# Altium PCB MainPCB.PcbDoc (part 3 of 4)
Units mm, origin at the board's own origin, x right, y up, seen from the top; angles counter-clockwise.
Board outline 219.96 x 164.97 mm, 2 copper layers (Top Layer, Bottom Layer); 298 components, 220 nets, 976 pads, 1045 vias.
Unrouted connection lines stored in the file: 1.
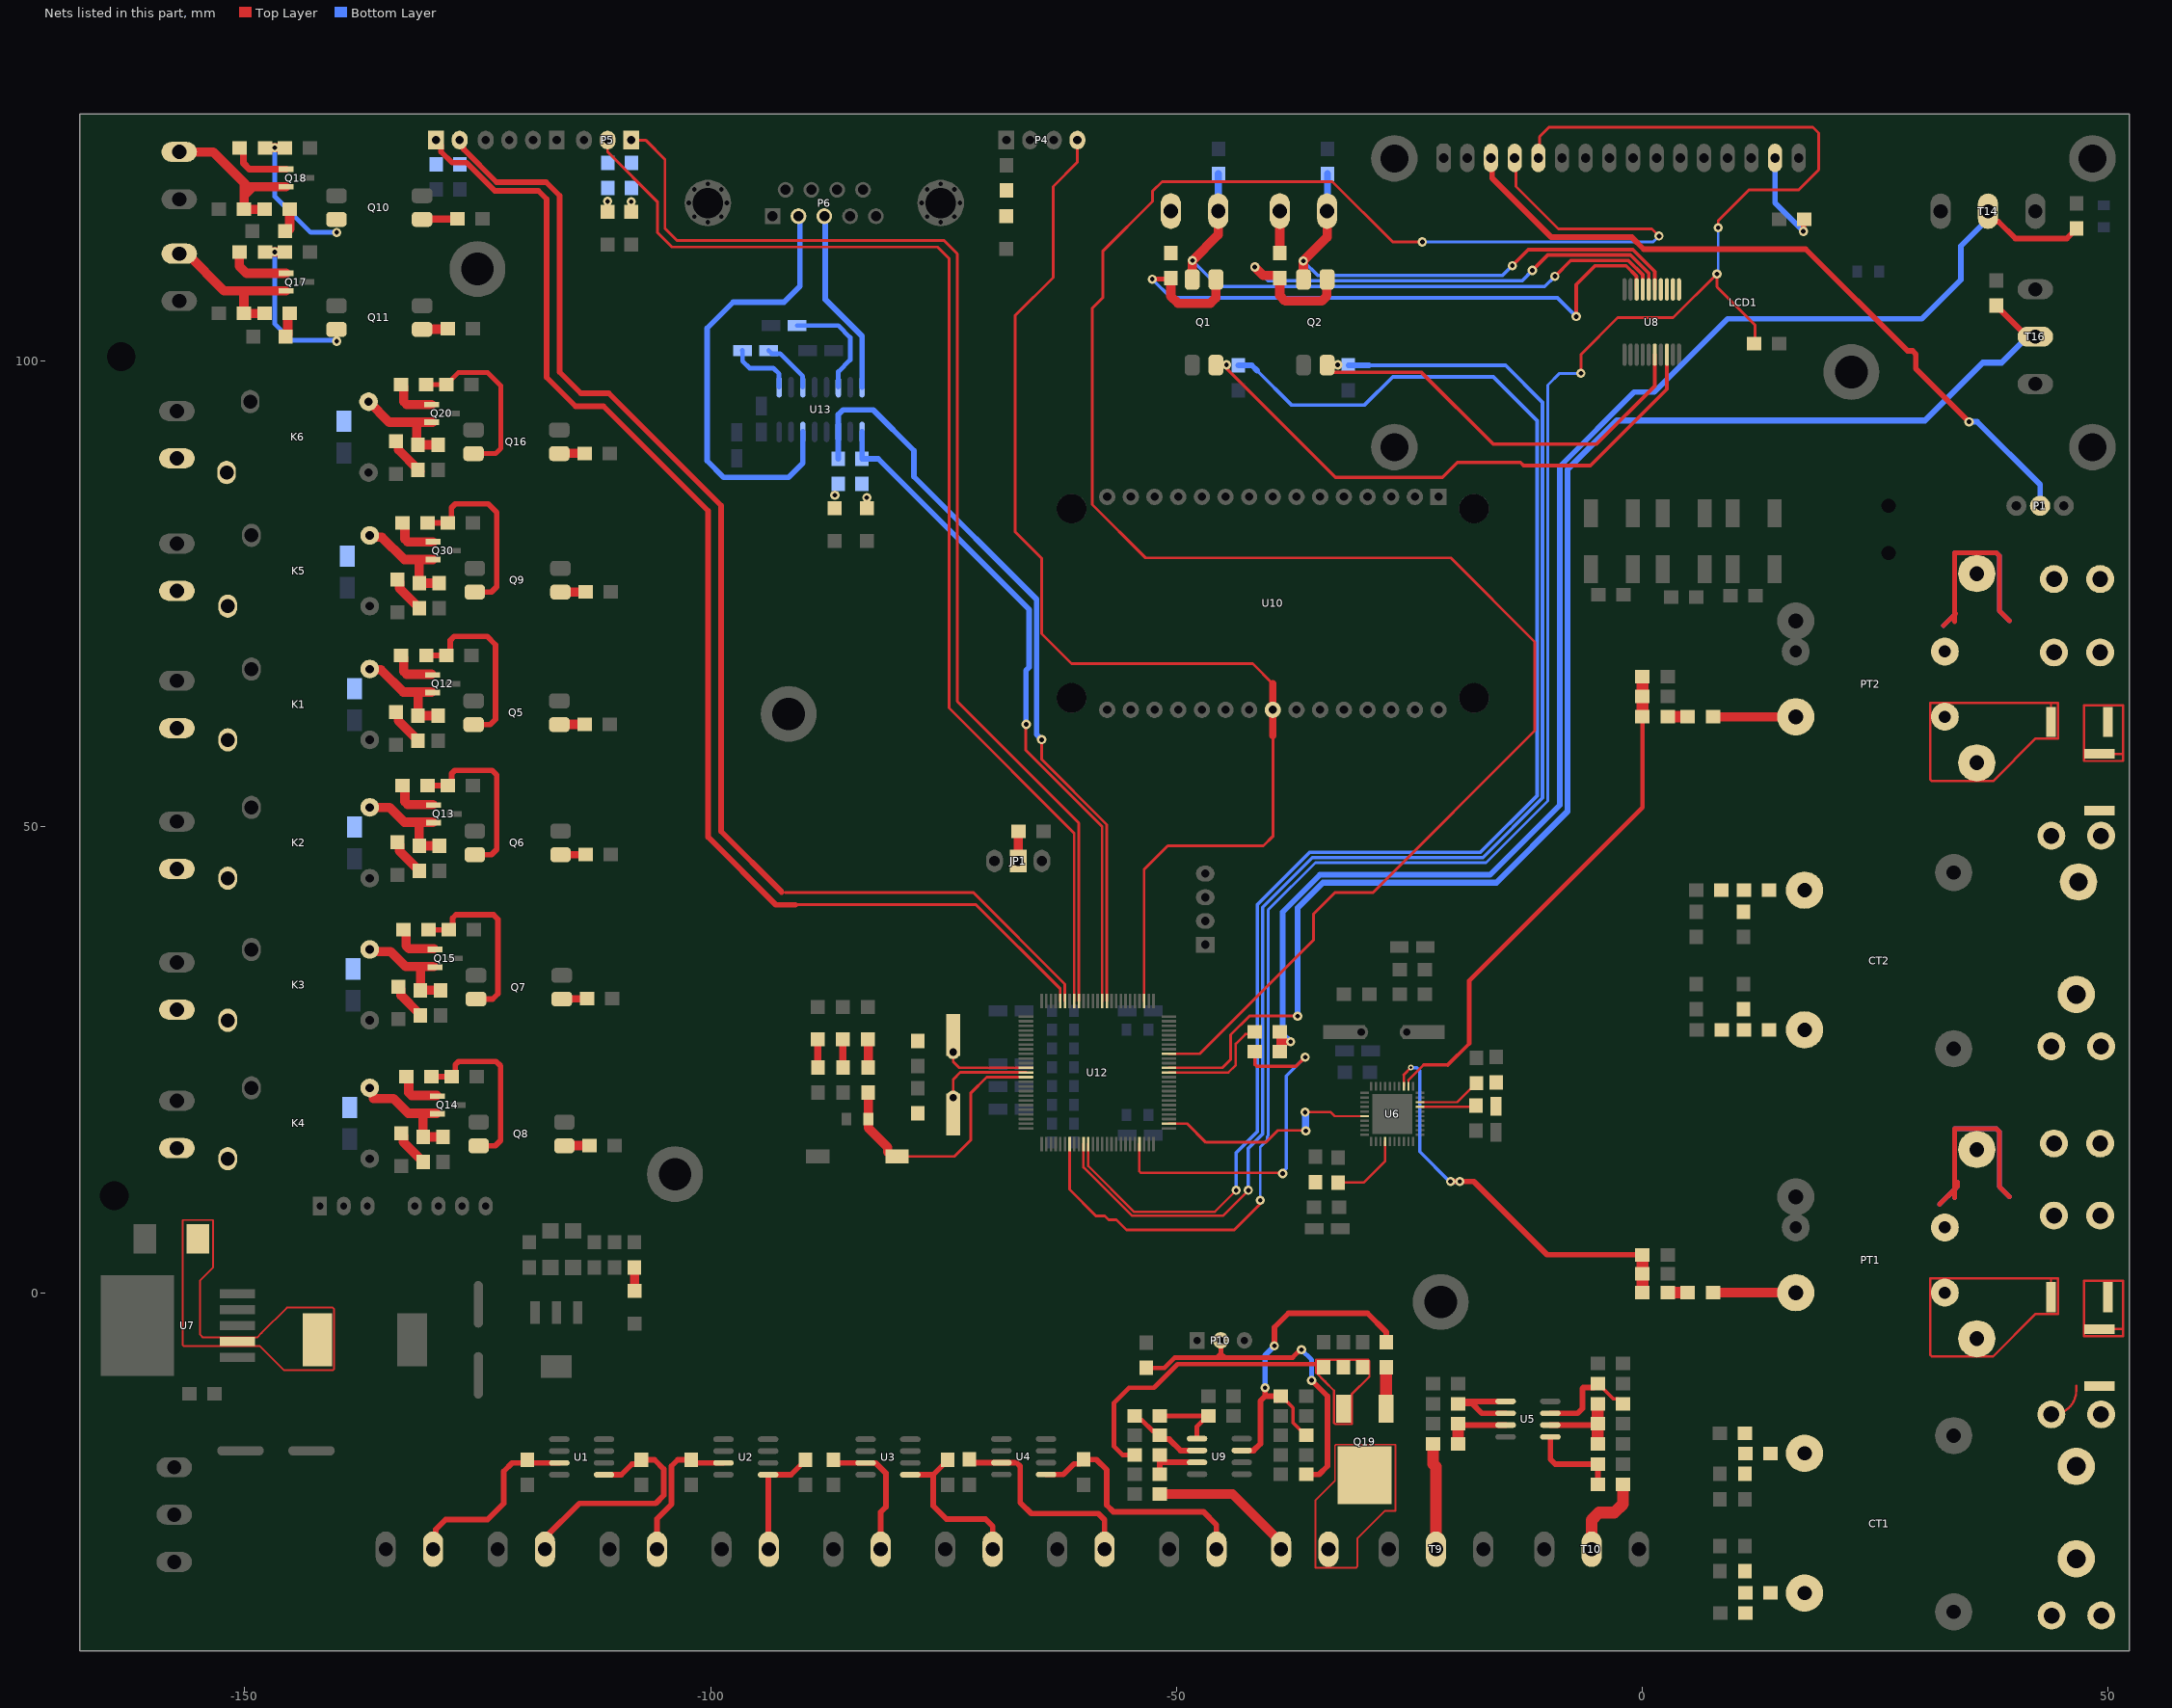
[diagram p3: the nets of this part, all layers, seen from the top]

## Via types
v1: diameter 0.762, hole 0.381, Top Layer to Bottom Layer, tented both sides, 733 vias
v2: diameter 1, hole 0.5, Top Layer to Bottom Layer, tented both sides, 230 vias
v3: diameter 1, hole 0.5, Top Layer to Bottom Layer, 35 vias
v4: diameter 1.2, hole 0.6, Top Layer to Bottom Layer, tented both sides, 28 vias
v5: diameter 0.8, hole 0.4, Top Layer to Bottom Layer, tented both sides, 10 vias
v6: diameter 1.27, hole 0.711, Top Layer to Bottom Layer, tented both sides, 4 vias
v7: diameter 0.6, hole 0.3, Top Layer to Bottom Layer, tented both sides, 3 vias
v8: diameter 1.27, hole 0.711, Top Layer to Bottom Layer, 1 vias
v9: diameter 0.9, hole 0.45, Top Layer to Bottom Layer, tented both sides, 1 vias

## Nets (pads, with @x,y where several pads share a name; then routed paths per layer and width w, separated by ;. In a path a pad name is that pad's centre, name@x,y a point inside that pad or via, vN(x,y) a via of type N, cw(c..) or ccw(c..) an arc to the next point about the centre after c; other vN are vias at no path point) (continued)
NetC33_1: C33.1 R108.1 R112.2 U9.7 | length 37.7
  Top Layer w0.381: R112.2@-38.803,-11.116 -38.703,-11.216 -38.653,-11.216 -37.503,-12.366 -37.503,-13.966 -36.153,-15.316 C33.1@-36.103,-15.316
  Top Layer w0.61: U9.7@-43.003,-16.946 -41.733,-16.946 -41.003,-16.216 -41.003,-16.18 -40.998,-16.175 -40.998,-15.177 -41.003,-15.172 -41.003,-11.616 -40.503,-11.116 ; v2(-40.503,-10.216) -40.503,-11.116 ; v2(-39.503,-5.716) -39.503,-3.716 -38.003,-2.216 -29.503,-2.216 -27.503,-4.216 R108.1@-27.503,-5.084 ; R112.2@-39.223,-11.536 R112.2@-38.803,-11.116 -40.503,-11.116 ; R108.1@-27.735,-5.084 R108.1@-27.503,-5.316
  Bottom Layer w0.61: v2(-40.503,-10.216) -40.503,-6.716 v2(-39.503,-5.716)
NetC47_1: C47.1 pad.9@-73.977,25.828 U12.12 Y3.2 | length 11.3
  Top Layer w0.3: Y3.2@-73.977,26.322 -73.977,24.78 -73.334,24.137 U12.12@-66.163,24.137
  Top Layer w1: Y3.2@-73.977,27.633 -73.977,26.322 Y3.2@-73.727,26.072
NetC48_1: C48.1 pad.8@-73.977,20.938 U12.13 Y3.1 | length 11.9
  Top Layer w0.3: Y3.1@-73.977,20.081 -73.977,20.633 -73.977,22.875 -73.215,23.637 U12.13@-66.163,23.637
  Top Layer w1: Y3.1@-73.977,19.133 Y3.1@-73.977,20.081
NetC49_1: C49.1 U13.1 | length 7.1
  Bottom Layer w0.5: C49.1@-96.589,101.135 -96.583,101.129 -96.583,99.992 -95.821,99.23 -93.281,99.23 -92.665,98.614 -92.665,97.204 U13.1@-92.646,97.185
NetC49_2: C49.2 U13.3 | length 6
  Bottom Layer w0.5: C49.2@-93.789,101.135 -93.44,100.785 -92.551,100.785 -90.125,98.36 -90.125,97.204 U13.3@-90.106,97.185
NetC51_2: C51.2 U13.6 | length 12.1
  Bottom Layer w0.5: C51.2@-90.741,103.802 -86.296,103.802 -85.026,102.532 -85.026,100.119 -86.296,98.849 U13.6@-86.296,97.185
NetCT1_1: CT1.1 Fr3.1
NetCT1_2: CT1.2 Fr1.1
NetCT1_3: pad.7@46.546,32.019 X8.1
NetCT2_1: CT2.1 Fr6.1
NetCT2_2: CT2.2 Fr4.1
NetCT2_3: pad.7@46.546,-28.56 X10.1
NetD1_1: D1.1 R30.1 | length 2.6
  Top Layer w1: D1.1@-108.172,0.173 R30.1@-108.172,2.713 R30.1@-108.108,2.777
NetD2_2: D2.2 L1.2 U7.2 | length 69.9
  Top Layer w0.2: U7.2@-152.191,-5.21 U7.2@-152.586,-4.815 ; -148.199,-4.328 -148.686,-4.815 U7.2@-152.586,-4.815 ; -148.199,-4.327 -145.477,-1.605 -140.547,-1.605 -140.43,-1.722 -140.43,-8.219 -140.547,-8.336 -145.797,-8.336 -148.418,-5.715 -156.569,-5.715 -156.686,-5.598 -156.686,7.793 -153.384,7.793 -153.384,2.713 -154.786,1.311 -154.786,-4.521 -154.492,-4.815 U7.2@-152.586,-4.815
NetD4_1: D4.1 R66.1 | length 4.1
  Top Layer w1: D4.1@-133.754,62.308 -133.504,62.058 -133.504,61.377 -131.628,59.501 -131.628,59.451 R66.1@-131.403,59.226
NetD5_1: D5.1 R68.1 | length 4.1
  Top Layer w1: D5.1@-133.627,48.338 -133.377,48.088 -133.377,47.407 -131.501,45.531 -131.501,45.481 R68.1@-131.276,45.256
NetD6_1: D6.1 R69.1 | length 4.1
  Top Layer w1: D6.1@-133.218,17.096 -132.968,16.846 -132.968,16.165 -131.092,14.289 -131.092,14.239 R69.1@-130.867,14.014
NetD7_1: D7.1 R70.1 | length 4.1
  Top Layer w1: D7.1@-133.5,32.844 -133.25,32.594 -133.25,31.913 -131.374,30.037 -131.374,29.987 R70.1@-131.149,29.762
NetD8_1: D8.1 R74.1 | length 4.1
  Top Layer w1: D8.1@-133.634,76.532 -133.384,76.282 -133.384,75.601 -131.508,73.725 -131.508,73.675 R74.1@-131.283,73.45
NetD9_1: D9.1 R75.1 | length 2.7
  Top Layer w1.016: D9.1@-145.605,102.631 -145.389,102.847 -145.389,104.89 R75.1@-145.173,105.106
NetD10_1: D10.1 R76.1 | length 2.1
  Top Layer w1: D10.1@-145.173,114.14 R76.1@-145.173,116.282
NetD15_2: D15.2 R80.2 | length 3
  Top Layer w1: D15.2@-83.103,27.184 -83.09,27.172 -83.09,24.196 R80.2@-83.078,24.184
NetD16_2: D16.2 R88.2
NetD17_2: D17.2 R89.2 | length 0.2
  Top Layer w0.6: D17.2@-111.442,116.02 D17.2@-111.315,116.147
  other v2: -111.061,117.137
NetD18_2: D18.2 R90.2
  other v2: -108.521,117.109
NetD19_2: D19.2 R91.2
  other v2: -83.248,85.338
NetD20_2: D20.2 R92.2
  other v2: -86.677,85.592
NetD21_1: D21.1 R77.1 | length 4.3
  Top Layer w1: D21.1@-133.761,91.391 -133.511,91.141 -133.511,90.46 -131.41,88.359 R77.1@-131.41,88.309 R77.1@-131.219,88.118
NetD24_2: D24.2 R96.2 | length 3
  Top Layer w0.762: R96.2@-85.803,24.184 D24.2@-85.803,27.184
NetD25_2: D25.2 R97.2 | length 3
  Top Layer w0.762: R97.2@-88.503,24.184 D25.2@-88.503,27.184
NetFr1_2: Fr1.2 R28.1 R34.1
NetFr2_1: Fr2.1 pad.10@16.449,0 PT1.2 | length 8.9
  Top Layer w1: Fr2.1@7.525,0 Fr2.1@7.559,0 pad.10@16.449,0
NetFr2_2: Fr2.2 R118.2 | length 2
  Top Layer w1.27: R118.2@2.827,0 Fr2.2@4.859,0
NetFr3_2: Fr3.2 R36.2 R37.1
NetFr4_2: Fr4.2 R38.1 R40.1
NetFr5_1: Fr5.1 pad.10@16.449,61.817 PT2.2 | length 8.9
  Top Layer w1: Fr5.1@7.559,61.817 PT2.2@16.449,61.817
NetFr5_2: Fr5.2 R119.2 | length 2.2
  Top Layer w1.27: R119.2@2.7,61.817 Fr5.2@4.859,61.817
NetFr6_2: Fr6.2 R42.2 R43.1
NetJP1_2: JP1.2 R84.1 | length 3.2
  Top Layer w1: JP1.2@-67.003,46.334 -66.978,46.359 -66.978,49.509 R84.1@-66.953,49.534
NetLCD1_3: LCD1.3 P1.2 | length 77.8
  Top Layer w0.6: LCD1.3@-16.129,121.793 -16.129,119.634 -9.779,113.284 -1.143,113.284 0.127,112.014 17.526,112.014 28.448,101.092 28.986,101.092 29.337,100.741 29.337,99.187 v3(35.052,93.472)
  Bottom Layer w0.6: v3(35.052,93.472) 35.941,93.472 42.672,86.741 P1.2@42.672,84.455
NetLCD1_15: LCD1.15 R23.1 | length 10.6
  Top Layer w0.6: v3(17.272,113.919) 17.272,115.109 R23.1@17.352,115.189
  Bottom Layer w0.6: LCD1.15@14.097,121.92 LCD1.15@14.224,121.793 14.224,116.967 v3(17.272,113.919)
NetP10_2: P10.2 R107.1 R116.1 | length 37.2
  Top Layer w0.508: R116.1@-53.258,-8.084 -51.305,-8.084 -50.183,-6.962 -45.692,-6.962 ; P10.2@-45.257,-5.13 -45.257,-6.527 ; -44.495,-6.962 -44.822,-6.962 ; v2(-36.603,-6.116) -36.696,-6.116 -37.542,-6.962 -44.822,-6.962 ; -45.692,-6.962 -45.257,-6.962 ; -45.692,-6.962 -45.257,-6.527 ; -45.257,-6.962 -44.822,-6.962 ; -45.257,-6.962 -45.257,-6.527 ; -45.257,-6.527 -44.822,-6.962
  Top Layer w0.61: R107.1@-36.103,-19.516 -34.703,-19.516 -33.803,-18.616 -33.803,-11.116 v2(-35.503,-9.416)
  Bottom Layer w0.508: v2(-36.603,-6.116) -35.503,-7.216 v2(-35.503,-9.416)
NetPT1_4: pad.10@35.88,-4.953 PT1.4 R33.2 | length 43.5
  Top Layer w0.254: R33.2@43.843,-0.495 43.843,1.537 ; 43.843,1.537 44.609,1.537 44.609,-2.273 44.228,-2.273 42.196,-2.273 37.624,-6.845 31.042,-6.845 30.893,-6.696 30.893,1.537 43.843,1.537
NetPT2_4: pad.10@35.88,56.864 PT2.4 R85.2 | length 43.5
  Top Layer w0.254: R85.2@43.843,61.26 43.843,63.292 ; 43.843,63.292 30.893,63.292 30.893,55.059 31.042,54.91 37.624,54.91 42.196,59.482 44.228,59.482 44.609,59.482 44.609,63.292 43.843,63.292
NetQ5_1: Q5.1 R47.2 | length 2.7
  Top Layer w1: Q5.1@-116.225,60.991 R47.2@-113.549,60.991
NetQ6_1: Q6.1 R50.2 | length 2.7
  Top Layer w0.762: Q6.1@-116.113,47.005 -116.098,47.021 -113.422,47.021 R50.2@-113.407,47.036
NetQ7_1: Q7.1 R51.2 | length 2.7
  Top Layer w0.8: Q7.1@-115.986,31.511 -115.97,31.527 -113.295,31.527 R51.2@-113.28,31.542
NetQ8_1: Q8.1 R52.2 | length 2.7
  Top Layer w1: Q8.1@-115.704,15.763 -115.689,15.779 -113.013,15.779 R52.2@-112.998,15.794
NetQ9_1: Q9.1 R17.2 | length 2.7
  Top Layer w1: Q9.1@-116.12,75.199 -116.105,75.215 -113.429,75.215 R17.2@-113.414,75.23
NetQ10_1: Q10.1 R57.2 | length 3.8
  Top Layer w0.762: Q10.1@-130.972,115.204 -130.941,115.235 -127.203,115.235 R57.2@-127.172,115.266
NetQ11_1: Q11.1 R58.2 | length 2.8
  Top Layer w1: Q11.1@-130.972,103.393 -130.941,103.424 -128.266,103.424 R58.2@-128.235,103.455
NetQ12_1: Q12.1 R59.2 | length 5
  Top Layer w1: R59.2@-133.214,68.403 -133.164,68.403 -132.939,68.178 -132.939,66.681 -132.628,66.37 Q12.1@-129.934,66.37
NetQ13_1: Q13.1 R60.2 | length 5
  Top Layer w1: R60.2@-133.087,54.433 -133.037,54.433 -132.812,54.208 -132.812,52.711 -132.501,52.4 Q13.1@-129.807,52.4
NetQ14_1: Q14.1 R61.2 | length 5
  Top Layer w1: R61.2@-132.678,23.191 -132.628,23.191 -132.403,22.966 -132.403,21.469 -132.092,21.158 Q14.1@-129.398,21.158
NetQ15_1: Q15.1 R62.2 | length 5
  Top Layer w1: R62.2@-132.96,38.939 -132.91,38.939 -132.685,38.714 -132.685,37.217 -132.374,36.906 Q15.1@-129.68,36.906
NetQ16_1: Q16.1 R53.2 | length 2.7
  Top Layer w1: Q16.1@-116.216,90.089 R53.2@-113.541,90.089
NetQ17_1: Q17.1 R64.2 | length 6.9
  Top Layer w1: R64.2@-150.54,111.71 -150.587,111.663 -150.587,110.186 -149.824,109.423 Q17.1@-145.562,109.423
NetQ18_1: Q18.1 R65.2 | length 6.7
  Top Layer w0.762: R65.2@-150.54,122.886 -150.49,122.886 -150.146,122.542 -150.146,121.222 -149.523,120.599 Q18.1@-145.562,120.599
NetQ19_1: Q19.1 R108.2 | length 4.4
  Top Layer w1.27: Q19.1@-27.518,-12.436 -27.51,-12.428 -27.51,-8.023 R108.2@-27.503,-8.016
NetQ19_2: Q19.2 T20.2 | length 42.4
  Top Layer w0.2: T20.2@-33.707,-27.545 -33.707,-29.516 ; -33.707,-29.516 -30.72,-29.516 -30.603,-29.399 -30.603,-26.416 -27.603,-23.416 -26.503,-23.416 -26.503,-16.316 -32.886,-16.316 -33.003,-16.433 -33.003,-20.216 -35.103,-22.316 -35.103,-29.516 -33.707,-29.516
NetQ19_3: Q19.3 R109.1 R113.2 R114.2 R115.2 | length 54.5
  Top Layer w0.254: R115.2@-34.203,-8.016 -34.203,-7.216 ; -34.203,-7.216 -29.452,-7.216 -29.303,-7.365 -29.303,-9.016 -31.203,-10.916 -31.203,-14.116 -32.954,-14.116 -33.103,-13.967 -33.103,-10.516 -34.05,-9.569 -34.05,-9.558 -35.003,-8.605 -35.003,-7.67 -35.003,-7.216 -34.203,-7.216
  Top Layer w0.508: R109.1@-54.503,-17.416 -55.803,-17.416 -56.703,-16.516 -56.703,-11.82 -55.096,-10.213 -52.433,-10.213 -49.889,-7.67 -35.003,-7.67 R115.2@-34.803,-7.67
NetQ20_1: Q20.1 R63.2 | length 5.1
  Top Layer w1: R63.2@-133.221,97.486 -133.171,97.486 -132.946,97.261 -132.946,95.637 -132.635,95.326 Q20.1@-129.941,95.326
NetQ30_1: Q30.1 R56.2 | length 5
  Top Layer w1: R56.2@-133.094,82.627 -133.044,82.627 -132.819,82.402 -132.819,80.905 -132.508,80.594 Q30.1@-129.814,80.594
NetR1_2: R1.2 T1.2 U1.3 | length 20.5
  Top Layer w0.6: T1.2@-129.792,-27.545 -129.5,-27.253 -129.5,-25.413 -128.453,-24.366 -123.953,-24.366 -122.203,-22.616 -122.203,-19.173 -121.303,-18.273 U1.3@-116.242,-18.273
NetR2_2: R2.2 T2.2 U1.5 | length 27.2
  Top Layer w0.6: T2.2@-117.781,-27.545 -117.781,-26.298 -114.1,-22.616 -105.903,-22.616 -105.028,-21.741 -105.028,-18.941 -106.03,-17.939 R2.2@-107.443,-17.939 -107.443,-17.989 -107.868,-18.414 -108.451,-18.414 -109.58,-19.543 U1.5@-111.442,-19.543
  Bottom Layer w0.6: T2.2@-117.781,-27.545 T2.2@-117.781,-26.532
NetR3_2: R3.2 T3.2 U2.3 | length 15.6
  Top Layer w0.6: T3.2@-105.771,-27.545 -105.771,-24.284 -104.203,-22.716 -104.203,-18.616 -103.526,-17.939 R3.2@-102.075,-17.939 -101.741,-18.273 U2.3@-98.633,-18.273
NetR4_2: R4.2 T4.2 U2.5 | length 12.7
  Top Layer w0.6: U2.5@-93.833,-19.543 U2.5@-93.797,-19.543 ; T4.2@-93.797,-27.509 U2.5@-93.797,-19.543 ; R4.2@-89.834,-17.939 -89.834,-17.989 -91.388,-19.543 U2.5@-93.797,-19.543
  Bottom Layer w0.6: T4.2@-93.806,-27.5 T4.2@-93.76,-27.545
NetR5_2: R5.2 T5.2 U3.3 | length 14.6
  Top Layer w0.6: R5.2@-86.831,-17.939 -86.497,-18.273 U3.3@-83.376,-18.273 -82.303,-18.273 -81.203,-19.373 -81.203,-23.016 -81.75,-23.563 T5.2@-81.75,-27.545
NetR6_2: R6.2 T6.2 U3.5 | length 17.9
  Top Layer w0.6: U3.5@-78.576,-19.543 U3.5@-77.776,-19.543 ; U3.5@-77.739,-19.58 U3.5@-77.776,-19.543 ; R6.2@-74.577,-17.939 -74.577,-17.989 -76.131,-19.543 ; T6.2@-69.739,-27.545 -69.739,-25.08 -70.503,-24.316 -74.703,-24.316 -76.131,-22.888 -76.131,-19.543 ; U3.5@-77.776,-19.543 -76.131,-19.543
NetR7_2: R7.2 T7.2 U4.3 | length 22.2
  Top Layer w0.6: R7.2@-71.91,-18.25 U4.3@-68.802,-18.25 -67.165,-18.25 -66.777,-18.638 -66.777,-22.542 -65.603,-23.716 -58.403,-23.716 -57.729,-24.39 T7.2@-57.729,-27.545
NetR8_2: R8.2 T8.2 U4.5 | length 26.1
  Top Layer w0.6: U4.5@-64.002,-19.52 -62.14,-19.52 -61.011,-18.391 R8.2@-60.428,-18.391 ; R8.2@-60.003,-17.916 -58.603,-17.916 -57.503,-19.016 -57.503,-22.816 -56.803,-23.516 -47.118,-23.516 -45.718,-24.916 T8.2@-45.718,-27.545
NetR9_2: R9.2 U5.1 U5.2 | length 10.7
  Top Layer w0.6: U5.2@-14.687,-12.941 -17.24,-12.941 -18.256,-11.925 R9.2@-19.78,-11.925 -19.526,-11.671 U5.1@-14.687,-11.671
NetR10_2: R10.2 R31.1 U5.7 | length 11.3
  Top Layer w0.381: R10.2@-4.794,-9.766 -4.744,-9.766 -3.119,-11.391 -2.628,-11.391 R31.1@-2.094,-11.925
  Top Layer w0.6: U5.7@-9.887,-12.941 -6.953,-12.941 -6.445,-12.433 -6.445,-10.274 -6.362,-10.191 -5.219,-10.191 R10.2@-4.794,-9.766
NetR11_1: R11.1 T9.2 | length 11.4
  Top Layer w1.27: R11.1@-22.48,-16.243 -22.48,-18.369 -22.161,-18.688 T9.2@-22.161,-27.544
NetR11_2: R11.2 R13.2 U5.3 | length 7.3
  Top Layer w0.61: R13.2@-19.78,-14.084 -19.658,-14.206 -14.692,-14.206 U5.3@-14.687,-14.211
  Top Layer w1.27: R11.2@-19.78,-16.243 R13.2@-19.78,-14.084
NetR12_1: R12.1 T10.2 | length 9.3
  Top Layer w1.27: T10.2@-5.46,-27.544 -5.46,-24.403 -4.667,-23.609 -3.016,-23.609 -2.094,-22.687 R12.1@-2.094,-20.561
NetR12_2: R12.2 R14.2 U5.5 | length 9.9
  Top Layer w0.6: U5.5@-9.887,-15.481 -9.887,-17.881 -9.366,-18.402 R14.2@-4.794,-18.402 R12.2@-4.794,-20.561
NetR19_1: R19.1 T12.2
NetR21_1: R21.1 T13.2 | length 4.5
  Top Layer w1: R21.1@-38.925,111.601 T13.2@-38.925,116.093
NetR31_2: R31.2 R32.1 R117.1 U5.6 | length 9.5
  Top Layer w0.61: U5.6@-9.887,-14.211 -9.882,-14.206 -4.916,-14.206 R32.1@-4.794,-14.084
  Top Layer w1.27: R117.1@-4.794,-16.243 R32.1@-4.794,-14.084 R31.2@-4.794,-11.925
NetR33_1: R33.1 R39.1 | length 22.9
  Top Layer w0.254: R39.1@49.054,-3.92 51.594,-3.92 ; 51.594,-3.92 51.594,1.283 47.403,1.283 47.403,-4.686 51.594,-4.686 51.594,-3.92
NetR85_1: R85.1 R93.1 | length 22.9
  Top Layer w0.254: R93.1@49.054,57.835 51.594,57.835 ; 51.594,57.835 51.594,57.069 47.403,57.069 47.403,63.038 51.594,63.038 51.594,57.835
NetR102_2: R102.2 U12.63 | length 12.3
  Top Layer w0.254: U12.63@-50.803,23.637 -44.435,23.637 -43.638,24.434 -43.638,26.72 -42.61,27.748 -41.839,27.748 R102.2@-41.603,27.984
NetR103_2: R103.2 U12.47 | length 39.2
  Top Layer w0.254: U12.47@-53.983,15.957 -53.983,13.014 -53.834,12.865 -38.693,12.865 v2(-38.612,12.784)
  Top Layer w0.381: R103.2@-41.603,25.884 -41.603,24.507 -41.38,24.284 -37.184,24.284 v2(-36.195,25.273)
  Bottom Layer w0.381: v2(-38.612,12.784) -38.612,12.931 -38.227,13.317 -38.227,23.26 -36.214,25.273 v2(-36.195,25.273)
NetR104_1: R104.1 R106.2 U9.2 | length 8.2
  Top Layer w0.508: R104.1@-54.503,-13.216 -54.032,-13.687 -53.732,-13.687 -52.574,-14.845 -52.274,-14.845 R106.2@-51.803,-15.316
  Top Layer w0.61: R106.2@-51.803,-15.316 -51.383,-15.736 -50.783,-15.736 -49.573,-16.946 U9.2@-47.803,-16.946
NetR104_2: R104.2 R110.1 U9.1 | length 8.1
  Top Layer w0.508: R104.2@-51.803,-13.216 R110.1@-46.653,-13.216 ; U9.1@-47.803,-15.676 -47.803,-14.366 R110.1@-46.653,-13.216 ; R110.1@-46.603,-13.216 R110.1@-46.653,-13.216
NetR105_2: R105.2 T20.1 | length 15.9
  Top Layer w1.016: R105.2@-51.803,-21.616 -44.003,-21.616 -38.787,-26.832 T20.1@-38.787,-27.545
NetR109_2: R109.2 R111.2 U9.3 | length 5.9
  Top Layer w0.61: R111.2@-51.803,-19.516 R109.2@-51.803,-17.416 ; -51.603,-18.216 U9.3@-47.803,-18.216
NO1: K1.NO X1.2
NO2: K2.NO X2.2
NO3: K3.NO X3.2
NO4: K4.NO X4.2
NO5: K6.NO X6.2
NO6: K5.NO X5.2
NRST: C42.2 R80.1 SW1.1 U12.14 | length 28.8
  Top Layer w0.3: SW1.1@-80.014,14.62 -73.85,14.62 -72.103,16.367 -72.103,21.396 -70.362,23.137 U12.14@-66.163,23.137
  Top Layer w0.5: SW1.1@-81.014,15.12 -80.514,14.62 SW1.1@-80.014,14.62
  Top Layer w1: R80.1@-83.078,21.484 C42.2@-83.078,18.634 -83.078,17.684 -81.014,15.62 SW1.1@-81.014,15.12
NULL1: pad.10@35.88,15.367 PT1.3 X11.1 X13.1 | length 45.9
  Top Layer w0.508: 31.897,9.484 33.497,11.084 ; 33.497,10.184 33.497,11.084 ; 33.797,11.884 33.797,11.384 33.497,11.084 ; 39.397,10.284 38.297,11.384 38.297,17.286 37.999,17.584 33.497,17.584 33.497,11.084
  Bottom Layer w0.508: 31.897,9.484 33.497,11.084 ; 33.497,10.184 33.497,11.084 ; 33.797,11.884 33.797,11.384 33.497,11.084 ; 39.397,10.284 38.297,11.384 38.297,17.286 37.999,17.584 33.497,17.584 33.497,11.084
NULL2: pad.10@35.88,77.184 PT2.3 X12.1 X14.1 | length 42.3
  Top Layer w0.508: 32.297,71.584 33.497,72.784 ; 33.497,72.001 33.497,72.784 ; 33.597,72.884 33.497,72.784 ; 39.397,72.101 38.297,73.201 38.297,79.103 37.999,79.401 33.497,79.401 33.497,72.784
  Bottom Layer w0.508: 32.297,71.584 33.497,72.784 33.497,79.401 37.999,79.401 38.297,79.103 38.297,73.201 39.397,72.101
out1: Q5.4 R45.1 R59.1 | length 19.9
  Top Layer w0.6: R59.1@-130.514,68.403 R45.1@-128.355,68.403 -127.939,68.819 -127.939,70.028 -127.531,70.436 -123.975,70.436 -123.086,69.547 -123.086,61.546 -123.657,60.975 Q5.4@-125.44,60.975
OUT1-Relay: D11.2 K1.C2 Q12.2 R66.2 R67.2 | length 12.6
  Top Layer w1: K1.C2@-136.708,67.061 -136.517,66.87 -135.395,66.87 -132.995,64.47 -131.465,64.47 ; Q12.2@-129.934,64.47 -131.465,64.47 ; R67.2@-129.244,61.926 R66.2@-131.403,61.926 -131.403,64.409 -131.465,64.47
out2: Q6.4 R46.1 R60.1 | length 19.4
  Top Layer w0.6: R60.1@-130.387,54.433 R46.1@-128.228,54.433 -127.812,54.849 -127.812,55.707 -127.461,56.058 -123.44,56.058 -122.959,55.577 -122.959,47.576 -123.53,47.005 Q6.4@-125.313,47.005
OUT2-Relay: D12.2 K2.C2 Q13.2 R68.2 R71.2 | length 12.2
  Top Layer w1: K2.C2@-136.588,52.085 -134.453,52.085 -132.868,50.5 -131.338,50.5 ; Q13.2@-129.807,50.5 -131.338,50.5 ; R71.2@-129.117,47.956 R68.2@-131.276,47.956 -131.276,50.439 -131.338,50.5
out3: Q7.4 R48.1 R62.1 | length 19.4
  Top Layer w0.6: R62.1@-130.26,38.939 R48.1@-128.101,38.939 -127.685,39.355 -127.685,40.213 -127.334,40.564 -123.313,40.564 -122.832,40.083 -122.832,32.082 -123.403,31.511 Q7.4@-125.186,31.511
OUT3-Relay: D13.2 K3.C2 Q15.2 R70.2 R73.2 | length 12.2
  Top Layer w1: K3.C2@-136.461,36.591 -134.326,36.591 -132.741,35.006 -131.211,35.006 ; Q15.2@-129.68,35.006 -131.211,35.006 ; R73.2@-128.99,32.462 R70.2@-131.149,32.462 -131.149,34.945 -131.211,35.006
out4: Q8.4 R49.1 R61.1 | length 19.4
  Top Layer w0.6: R61.1@-129.978,23.191 R49.1@-127.819,23.191 -127.403,23.607 -127.403,24.465 -127.052,24.816 -123.031,24.816 -122.55,24.335 -122.55,16.334 -123.121,15.763 Q8.4@-124.904,15.763
OUT4-Relay: D14.2 K4.C2 Q14.2 R69.2 R72.2 | length 12.2
  Top Layer w1: -136.179,20.843 -134.044,20.843 -132.459,19.258 -130.929,19.258 ; Q14.2@-129.398,19.258 -130.929,19.258 ; R72.2@-128.708,16.714 R69.2@-130.867,16.714 -130.867,19.197 -130.929,19.258
out5: Q16.4 R16.1 R63.1 | length 19
  Top Layer w0.5: R63.1@-130.521,97.486 -128.312,97.486 -127.837,97.961 -127.837,98.011 -127.096,98.752 -123.917,98.752 -122.52,97.355 -122.52,90.628 -123.09,90.058 Q16.4@-125.447,90.058
OUT5-Relay: D23.2 K6.C2 Q20.2 R77.2 R82.2 | length 13.1
  Top Layer w0.508: R77.2@-131.41,90.959 R77.2@-131.41,91.009 ; R82.2@-129.476,90.734 -129.476,91.009 R82.2@-129.476,91.234
  Top Layer w1: K6.C2@-136.715,95.636 -134.505,93.426 -131.537,93.426 ; R77.2@-131.41,90.959 -131.537,91.086 -131.537,93.426 ; R77.2@-131.41,91.009 R82.2@-129.476,91.009 ; Q20.2@-129.841,93.426 Q20.2@-129.941,93.426 -131.537,93.426 ; R82.2@-129.476,91.234 R82.2@-129.251,91.009
out6: Q9.4 R15.1 R56.1 | length 19.9
  Top Layer w0.6: R56.1@-130.394,82.627 R15.1@-128.235,82.627 -127.819,83.043 -127.819,84.252 -127.411,84.66 -123.855,84.66 -122.966,83.771 -122.966,75.77 -123.537,75.199 Q9.4@-125.32,75.199
OUT6-Relay: D22.2 K5.C2 Q30.2 R74.2 R81.2 | length 12.6
  Top Layer w1: K5.C2@-136.588,81.285 -136.397,81.094 -135.275,81.094 -132.875,78.694 -131.345,78.694 ; Q30.2@-129.814,78.694 -131.345,78.694 ; R81.2@-129.124,76.15 R74.2@-131.283,76.15 -131.283,78.633 -131.345,78.694
OUT6-SSR: Q18.2 R76.2 R79.2 T23.1 | length 19.4
  Top Layer w1: T23.1@-157.035,122.443 -153.399,122.443 -150.079,119.123 ; R76.2@-147.873,116.282 R79.2@-150.079,116.282 -150.079,117.763 ; Q18.2@-145.562,118.699 -149.143,118.699 ; -150.079,117.763 -150.079,119.123 ; -150.079,117.763 -149.143,118.699 ; -150.079,119.123 -149.655,118.699 -149.143,118.699
out7: Q10.4 R54.1 R65.1 | length 17.8
  Top Layer w1: R65.1@-147.84,122.886 v2(-146.777,122.886) R54.1@-145.714,122.886
  Bottom Layer w0.5: v2(-146.777,122.886) -146.777,117.646 ; -145.246,116.115 -146.777,117.646 ; v2(-140.144,113.807) -142.938,113.807 -146.777,117.646
OUT7-SSR: Q17.2 R75.2 R78.2 T24.1 | length 17.8
  Top Layer w1.016: T24.1@-157.035,111.521 -156.209,111.521 -152.212,107.523 -150.206,107.523 ; R75.2@-147.873,105.106 R78.2@-150.079,105.106 -150.079,107.396 -150.206,107.523 ; Q17.2@-145.562,107.523 -150.206,107.523
out8: Q11.4 R55.1 R64.1 | length 17.3
  Top Layer w1.016: R64.1@-147.84,111.71 v2(-146.777,111.71) R55.1@-145.714,111.71
  Bottom Layer w0.5: v2(-146.777,111.71) -146.777,103.963 -145.033,102.219 -141.697,102.219 -140.24,102.219 v2(-140.144,102.123)
PH1: pad.7@46.546,-18.654 R39.2 X7.1 | length 4.6
  Top Layer w0.25: X7.1@43.879,-13.066 44.006,-13.066 ccw(c44.006,-10.526) 46.546,-10.526 46.546,-10.02
PH2: pad.7@46.8,44.084 R93.2 X9.1 | length 0.2
  Bottom Layer w1: X9.1@43.752,49.291 X9.1@43.879,49.164
Pulse1: Q1.4 R18.1 U8.8 U12.36 | length 226.3
  Top Layer w0.254: U12.36@-59.483,15.957 -59.483,13.596 -54.582,8.695 -45.881,8.695 -43.603,10.973 v2(-43.603,10.984)
  Top Layer w0.381: Q1.4@-45.783,99.555 -44.993,99.555 -32.941,87.503 -21.463,87.503 -19.851,89.115 -13.081,89.115 -12.74,88.775 -5.583,88.775 2.622,96.979 U8.8@2.622,100.684
  Bottom Layer w0.381: v2(-43.603,10.984) -43.603,15.005 -41.346,17.262 -41.346,41.617 -35.686,47.278 -17.367,47.278 -11.304,53.34 -11.304,93.6 -16.002,98.298 -26.797,98.298 -29.811,95.284 -37.674,95.284 -41.338,98.948
  Bottom Layer w0.6: R18.1@-43.37,99.536 -41.926,99.536 -41.338,98.948
  other v2: -44.64,99.583
Pulse2: Q2.4 R20.1 U8.6 U12.35 | length 199.1
  Top Layer w0.254: U12.35@-59.983,15.957 -59.983,13.454 -54.77,8.241 -45.035,8.241 -42.303,10.973 v2(-42.303,10.984)
  Top Layer w0.381: Q2.4@-33.845,99.555 -33.845,99.368 -33.251,98.775 -23.718,98.775 -16.039,91.096 -4.904,91.096 1.322,97.322 U8.6@1.322,100.684
  Bottom Layer w0.381: v2(-42.303,10.984) -42.303,15.483 -40.765,17.021 -40.765,41.377 -35.445,46.697 -17.127,46.697 -10.723,53.1 -10.723,95.559 -14.7,99.536 -29.353,99.536
  Bottom Layer w0.6: R20.1@-31.559,99.536 -29.353,99.536
  other v2: -32.702,99.583
PWM1: Q1.1 R19.2 U8.18 | length 71.1
  Top Layer w0.381: v2(-7.112,104.775) -7.112,108.204 -5.099,110.217 -1.761,110.217 -0.641,109.097 -0.641,107.697 U8.18@-0.628,107.684
  Top Layer w0.508: v2(-52.603,108.784) -50.726,108.784 R19.2@-50.609,108.901
  Top Layer w1: R19.2@-50.609,108.901 -50.609,106.949 -49.847,106.187 -46.369,106.187 -45.783,106.773 Q1.1@-45.783,108.755
  Bottom Layer w0.381: v2(-52.603,108.784) -50.598,106.779 -9.116,106.779 v2(-7.112,104.775)
PWM2: Q2.1 R21.2 U8.16 | length 59
  Top Layer w0.381: v2(-11.811,109.728) -10.16,111.379 -1.28,111.379 0.672,109.427 U8.16@0.672,107.684
  Top Layer w1: v2(-41.603,110.084) -40.695,109.176 -39.15,109.176 -38.925,108.951 R21.2@-38.925,108.901 -38.925,107.027 -38.339,106.441 -34.431,106.441 -33.874,106.997 -33.874,108.726 Q2.1@-33.845,108.755
  Bottom Layer w0.381: v2(-41.603,110.084) -40.122,108.603 -12.936,108.603 v2(-11.811,109.728)
PWM3: U8.14
PWM4: U8.12
REF: C16.1 C18.2 U6.17 | length 6
  Top Layer w0.25: U6.17@-23.886,19.942 C18.2@-17.869,19.942
RESET: C27.2 R44.1 U6.4 | length 8.1
  Top Layer w0.25: R44.1@-32.681,11.811 -29.923,11.811 -27.61,14.124 U6.4@-27.61,16.218
RS: LCD1.4 U12.67 | length 233.1
  Top Layer w0.3: U12.67@-50.803,25.637 -47.515,25.637 -35.306,37.846 -35.306,40.64 -33.02,42.926 -28.956,42.926 -11.557,60.325 -11.557,69.85 -20.574,78.867 -53.34,78.867 -59.055,84.582 -59.055,105.664 -57.928,106.791 -57.928,111.776 -52.578,117.126 -52.578,118.237 -51.562,119.253 -33.274,119.253 -26.797,112.776 v3(-23.622,112.776) ; LCD1.4@-13.589,121.793 -13.589,118.745 -9.017,114.173 1.016,114.173 v3(1.778,113.411)
  Bottom Layer w0.3: v3(-23.622,112.776) 1.143,112.776 v3(1.778,113.411)
RW: LCD1.5 R24.1 U12.32 | length 228.9
  Top Layer w0.3: U12.32@-61.483,15.957 -61.483,11.064 -58.666,8.247 -57.709,8.247 -57.296,7.834 -56.475,7.834 -55.372,6.731 -43.815,6.731 -41.021,9.525 v3(-41.021,9.906) ; LCD1.5@-11.049,121.793 -11.049,124.079 -10.033,125.095 18.288,125.095 18.923,124.46 18.923,120.523 16.764,118.364 11.43,118.364 8.128,115.062 v3(8.128,114.3) ; v3(-6.604,98.679) -6.604,100.711 -2.667,104.648 3.302,104.648 v3(8.001,109.347) 8.001,107.95 12.065,103.886 R24.1@12.065,101.854
  Bottom Layer w0.3: v3(-41.021,9.906) -41.021,15.621 -40.259,16.383 -40.259,16.763 -40.164,16.857 -40.164,41.098 -35.107,46.156 -16.788,46.156 -10.16,52.784 -10.16,97.409 -8.89,98.679 v3(-6.604,98.679) ; v3(8.001,109.347) 8.128,109.474 v3(8.128,114.3)
RX1-MCU: P5.2 R89.1 U12.93 | length 129.8
  Top Layer w0.3: P5.2@-111.061,123.713 -111.061,122.443 -105.727,117.109 -105.727,113.807 -104.154,112.234 -75.658,112.234 -74.422,110.998 -74.422,62.753 -60.983,49.314 U12.93@-60.983,31.317
RX2-MCU: R91.1 U12.87 U13.9 | length 73.1
  Top Layer w0.3: v2@-66.167,61.006 -66.167,58.219 -57.983,50.035 U12.87@-57.983,31.317
  Bottom Layer w0.6: U13.9@-83.756,92.385 R91.1@-83.756,89.503 -82.01,89.503 -65.831,73.324 -65.831,67.128 -66.167,66.792 -66.167,61.038 v2(-66.135,61.006)
RX-MAX: P6.3 U13.8 | length 20
  Bottom Layer w0.6: P6.3@-87.808,115.539 -87.693,115.424 -87.693,106.596 -83.756,102.659 U13.8@-83.756,97.185
SCK-ADE: U6.36 U12.52 | length 24.6
  Top Layer w0.25: v2(-36.203,19.367) -33.443,19.367 -33.018,18.942 U6.36@-29.834,18.942
  Top Layer w0.3: U12.52@-50.803,18.137 -48.864,18.137 -46.856,16.129 -40.42,16.129 -39.135,17.414 -36.184,17.414 v2(-36.133,17.363)
  Bottom Layer w0.762: v2(-36.203,19.367) -36.168,19.332 -36.168,17.398 v2(-36.133,17.363)
SCK-FREE: P4.4 U10.23 U12.78 | length 129.7
  Top Layer w0.3: P4.4@-60.642,123.713 -60.642,121.344 -63.246,118.74 -63.246,108.966 -67.31,104.902 -67.31,81.661 -64.476,78.827 -64.476,70.731 -61.259,67.514 -41.828,67.514 -39.669,65.355 ; U12.78@-53.483,31.317 -53.483,45.416 -50.943,47.956 -40.685,47.956 -39.669,48.972 -39.669,59.767
  Top Layer w0.762: -39.669,59.767 U10.23@-39.669,62.561 -39.669,65.355
SCL-FREE: P3.2 R86.1 U12.95 | length 135.8
  Top Layer w0.3: -92.003,42.934 -71.803,42.934 -61.983,33.114 U12.95@-61.983,31.317
  Top Layer w0.6: P3.2@-126.936,123.713 -126.936,123.265 -126.497,122.826 -126.497,122.728 -122.977,119.208 -117.651,119.208 -116.203,117.759 -116.203,98.814 -113.923,96.534 -110.923,96.534 -98.877,84.488 -98.877,49.508 -92.38,43.011
SDA-FREE: P3.1 R87.1 U12.96 | length 138.2
  Top Layer w0.3: -90.903,41.634 -71.503,41.634 -62.483,32.614 U12.96@-62.483,31.317
  Top Layer w0.6: P3.1@-129.476,123.713 -128.926,123.163 -128.926,122.457 -127.755,121.287 -126.187,121.287 -123.161,118.261 -118.483,118.261 -117.603,117.381 -117.603,98.234 -114.503,95.134 -111.503,95.134 -100.277,83.908 -100.277,48.908 -93.003,41.634 -90.903,41.634
TACHO1: Q1.2 R101.1 T12.1 U8.17 | length 65.3
  Top Layer w0.381: v2(-9.398,109.093) -7.693,110.798 -1.52,110.798 0.022,109.256 U8.17@0.022,107.684
  Top Layer w1: Q1.2@-48.323,108.755 v2@-48.323,110.759 ; v2@-48.301,110.782 -45.529,113.553 T12.1@-45.529,116.093
  Bottom Layer w0.381: v2(-48.303,110.784) -45.513,107.994 -10.497,107.994 v2(-9.398,109.093)
  Bottom Layer w0.762: T12.1@-45.503,116.105 R101.1@-45.503,120.084
TACHO2: Q2.2 R100.1 T13.1 U8.15 | length 54.8
  Top Layer w0.381: v2(-13.97,110.236) -12.246,111.96 -1.039,111.96 1.322,109.599 U8.15@1.322,107.684
  Top Layer w1: Q2.2@-36.385,108.755 v2@-36.385,110.741 ; v2@-36.385,110.759 -33.845,113.299 T13.1@-33.845,116.093
  Bottom Layer w0.381: v2(-36.403,110.741) -34.846,109.184 -15.022,109.184 v2(-13.97,110.236)
  Bottom Layer w0.762: T13.1@-33.803,116.105 R100.1@-33.803,120.084
TACHO3: U8.13
TACHO4: U8.11
Temp1: R22.1 R102.1 R103.1 T14.2 | length 159.7
  Top Layer w0.6: T14.2@37.084,116.078 37.084,115.674 37.804,114.954 38.208,114.954 40.005,113.157 45.546,113.157 46.134,113.745 46.184,113.745 46.609,114.17 R22.1@46.609,114.22
  Top Layer w0.762: R103.1@-38.903,25.884 -38.903,26.934 ; R102.1@-38.903,27.984 -38.903,26.934 ; v2(-37.753,26.934) -38.903,26.934
  Bottom Layer w0.6: v2(-37.753,26.934) -38.612,27.794 -38.612,40.859 -34.628,44.844 -16.359,44.844 -8.871,52.332 -8.871,88.684 -0.896,96.659 1.272,96.659 9.134,104.521 29.972,104.521 34.163,108.712 34.163,112.331 37.084,115.252 T14.2@37.084,116.078
Temp2: R25.1 T16.2 U12.64 | length 160.9
  Top Layer w0.3: U12.64@-50.803,24.137 -45.078,24.137 -44.196,25.019 -44.196,27.686 -42.198,29.684 v2(-37.003,29.684)
  Top Layer w0.65: R25.1@37.973,105.965 37.973,105.915 41.272,102.616 T16.2@42.164,102.616
  Bottom Layer w0.6: v2(-37.003,29.684) -37.003,41.302 -36.978,41.327
  Bottom Layer w0.65: -36.978,41.327 -34.286,44.019 -15.666,44.019 -8.046,51.639 -8.046,88.342 -2.774,93.614 30.305,93.614 36.512,99.822 38.544,99.822 41.338,102.616 T16.2@42.164,102.616
TX1-MCU: P5.1 R90.1 U12.92 | length 130
  Top Layer w0.3: P5.1@-108.521,123.713 -106.982,123.713 -104.903,121.634 -104.903,114.234 -103.587,112.918 -74.945,112.918 -73.533,111.506 -73.533,63.464 -60.483,50.414 U12.92@-60.483,31.317
TX2-MCU: R92.1 U12.86 U13.11 | length 82.5
  Top Layer w0.3: v2(-64.484,59.355) -64.484,57.243 -57.483,50.242 U12.86@-57.483,31.317
  Bottom Layer w0.6: R92.1@-86.296,89.503 U13.11@-86.296,92.385 -86.296,94.249 -85.788,94.757 -82.565,94.757 -78.182,90.374 -78.182,87.58 -65.031,74.429 -65.031,59.902 v2(-64.484,59.355)
TX-MAX: P6.2 U13.14 | length 48.6
  Bottom Layer w0.6: P6.2@-90.427,115.539 -90.427,108.025 -92.138,106.314 -97.599,106.314 -100.393,103.52 -100.393,89.296 -98.615,87.518 -91.63,87.518 -90.106,89.042 U13.14@-90.106,92.385
VAP: C12.2 R35.2 R118.1 U6.23 | length 45.7
  Top Layer w0.25: U6.23@-25.61,22.166 -25.61,23.402
  Top Layer w0.3: -25.61,23.402 v7(-24.84,24.171)
  Top Layer w0.6: v2(-20.603,11.934) v2(-19.603,11.934) -18.112,11.934 -10.242,4.064 C12.2@0,4.064
  Top Layer w1.27: R118.1@0,0 R35.2@0,2.032 C12.2@0,4.064
  Bottom Layer w0.35: v7(-24.84,24.171) -24.793,24.124 -24.193,24.124 -23.903,23.834
  Bottom Layer w0.4: -23.903,23.834 -23.903,15.134 -20.703,11.934 v2(-20.603,11.934)
  Bottom Layer w0.6: v2(-20.603,11.934) v2(-19.603,11.934)
VBP: C19.2 R41.2 R119.1 U6.22 | length 56.2
  Top Layer w0.25: U6.22@-25.11,22.166 -25.11,22.827
  Top Layer w0.3: -25.11,22.827 -23.503,24.434
  Top Layer w0.35: -23.503,24.434 -20.903,24.434
  Top Layer w0.4: -20.903,24.434 -18.605,26.732
  Top Layer w0.5: -18.605,26.732 -18.605,33.465 0,52.07 R119.1@0,61.817
  Top Layer w0.6: C19.2@-0.062,66.135 C19.2@0,66.135
  Top Layer w1: C19.2@-0.062,66.197 -0.062,66.135 -0.062,66.073 cw(c0,66.073) C19.2@0,66.135
  Top Layer w1.27: R119.1@0,61.817 R41.2@0,63.976 C19.2@0,66.135
VIN: C28.2 R83.2 U6.18 | length 7.1
  Top Layer w0.25: U6.18@-23.886,20.442 -19.897,20.442 -18.091,22.248 -18.041,22.248 C28.2@-17.855,22.434 ; R83.2@-15.853,22.434 R83.2@-15.703,22.584